# Altium PCB 7-Segment_PCB.PcbDoc
Units mm, origin at the board's own origin, x right, y up, seen from the top; angles counter-clockwise.
Board outline 30.25 x 44.05 mm, 2 copper layers (Top Layer, Bottom Layer), stack 1.571 mm thick; 33 components, 42 nets, 101 pads, 16 vias.
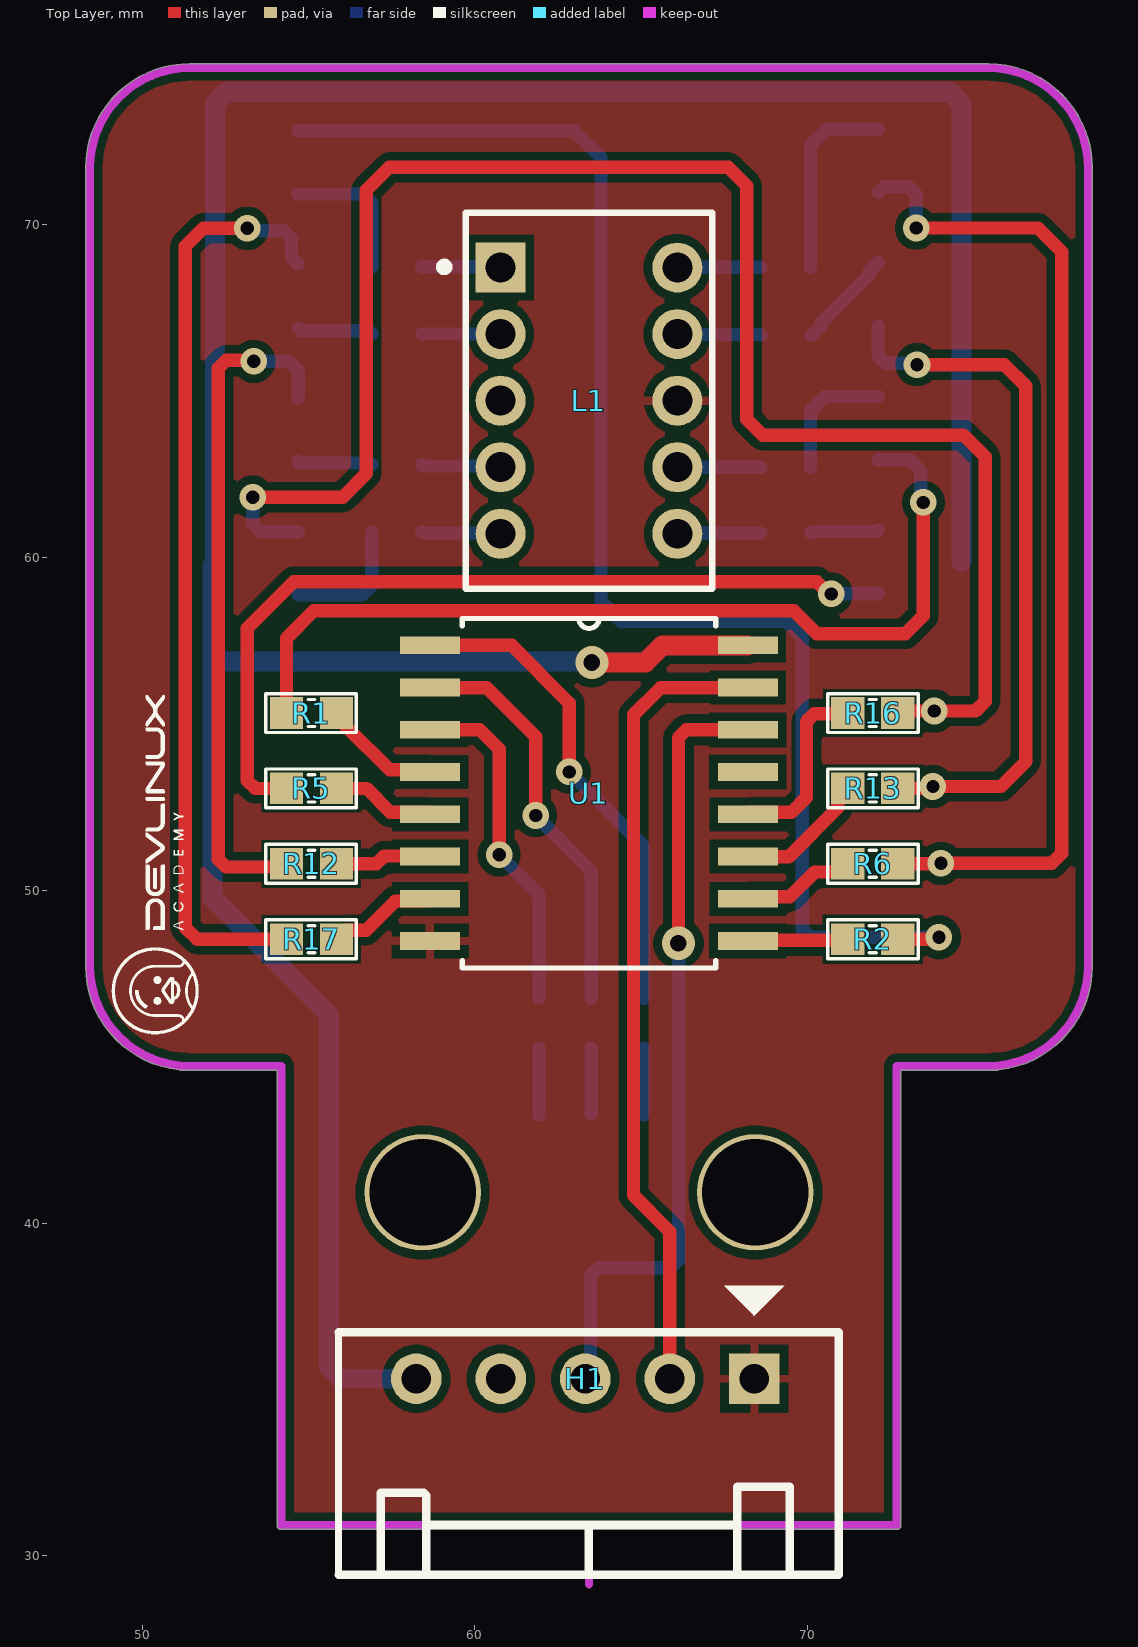
[diagram p0: Top Layer view]
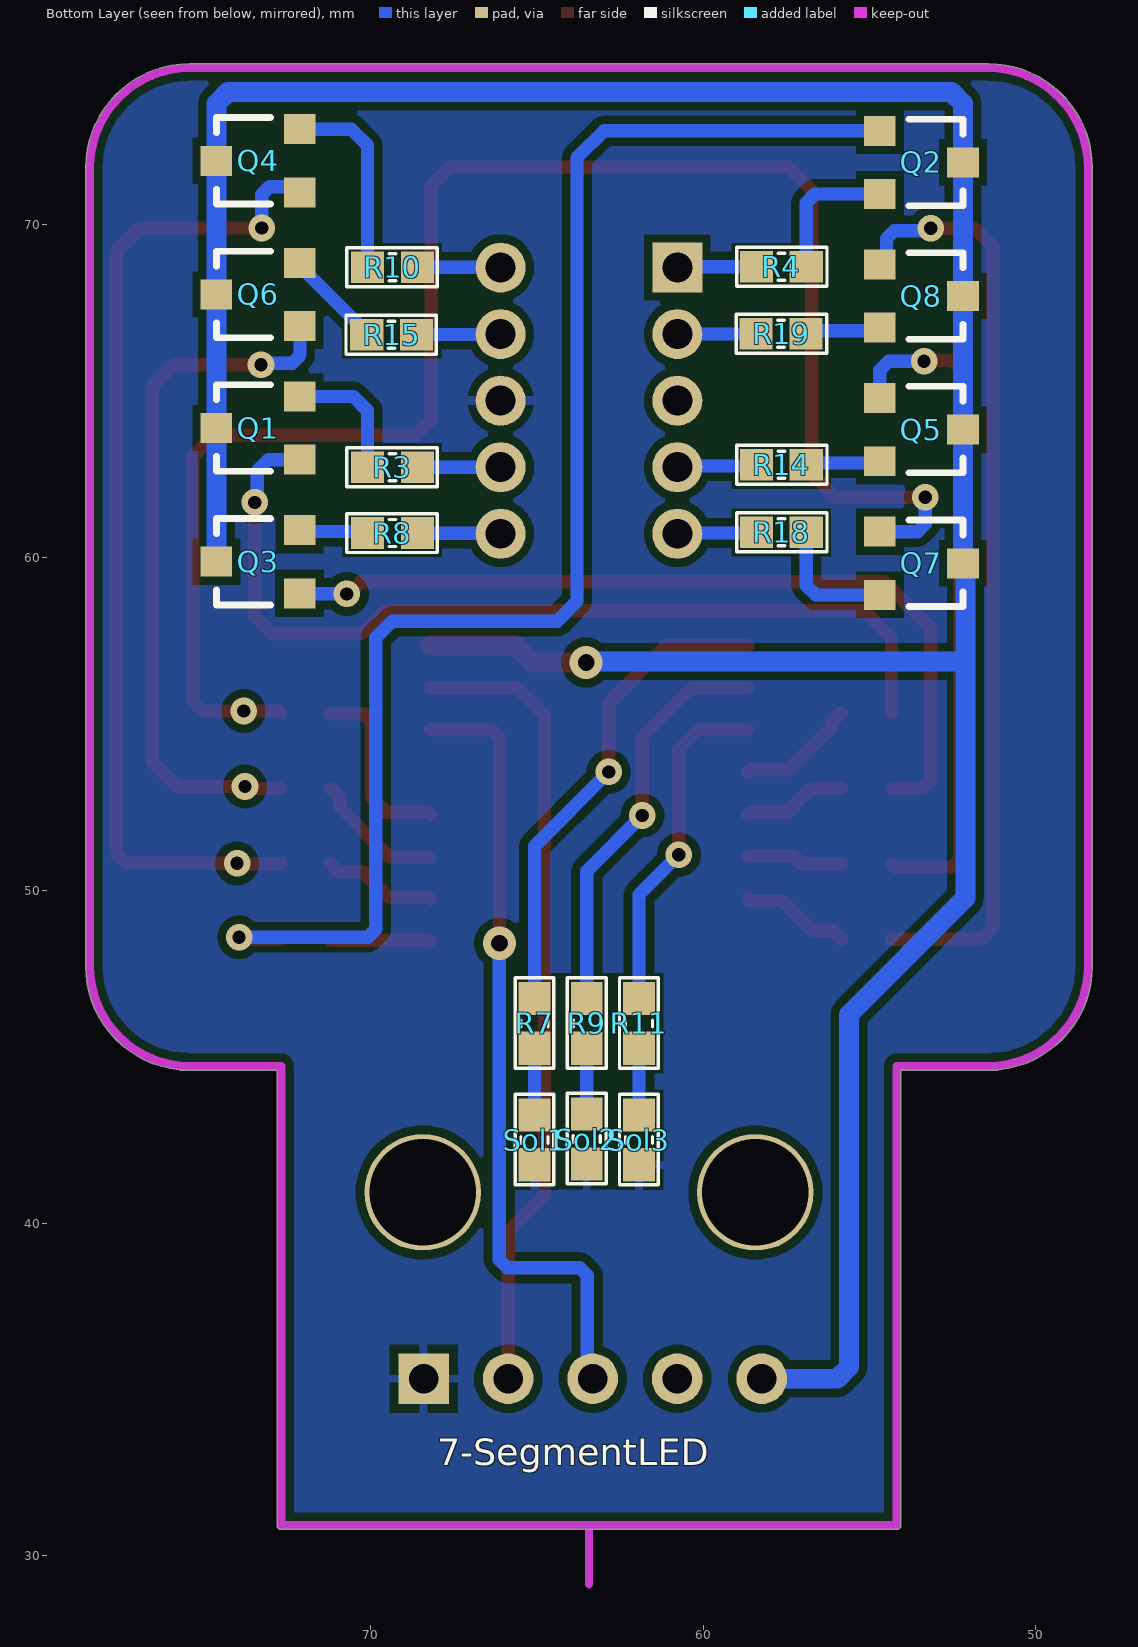
[diagram p1: Bottom Layer view, seen from below]
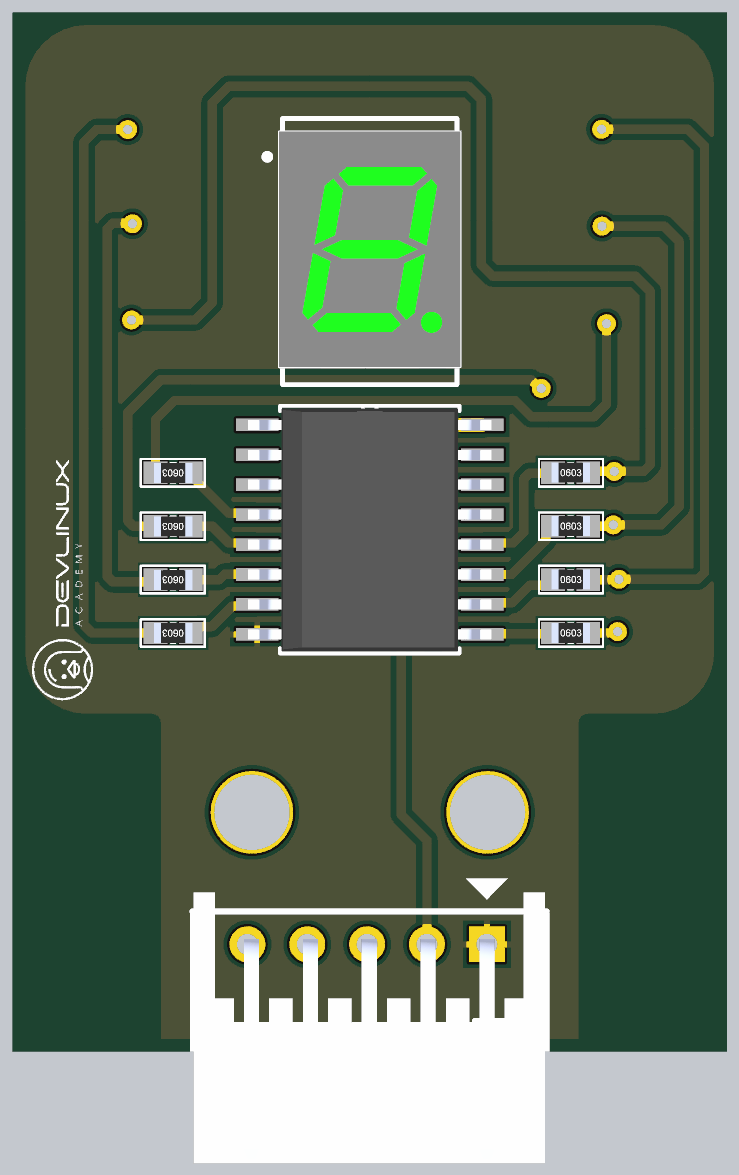
[diagram p2: 3D render of the assembled board from above, using the file's embedded part models]
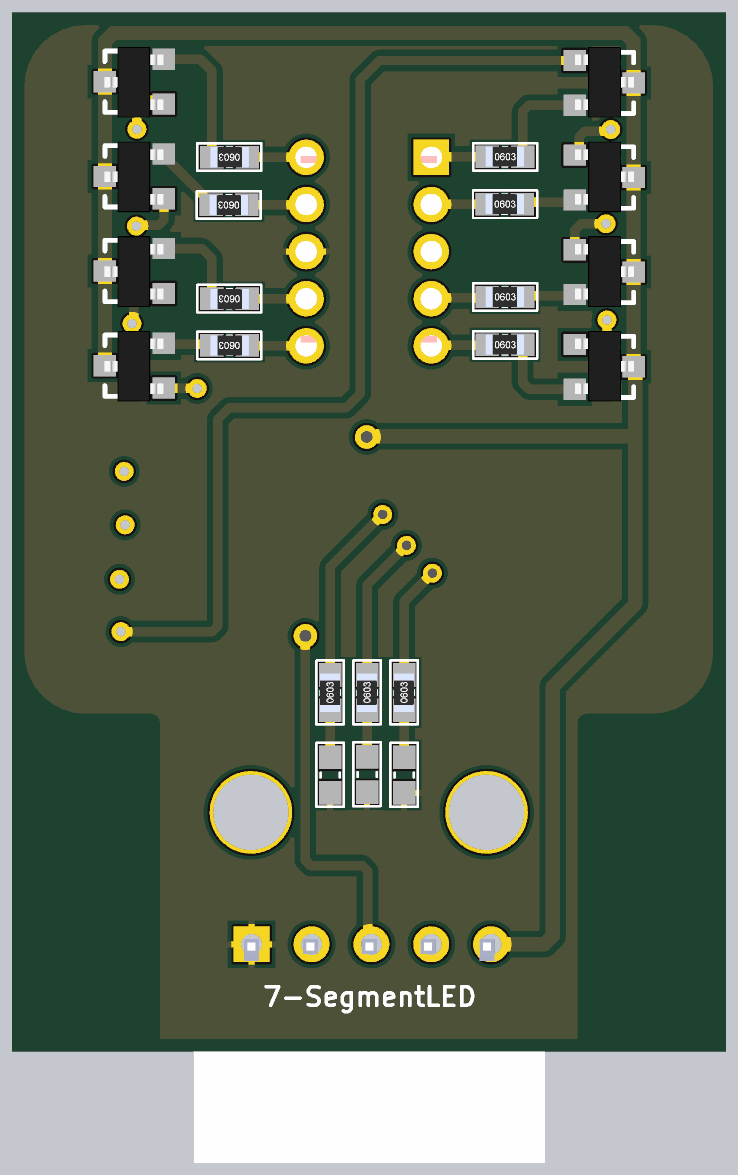
[diagram p3: 3D render of the assembled board from below, using the file's embedded part models]

## Layer stack, top to bottom
Top Solder: solder mask 0.0102, Solder Resist, Dk 3.5
Top Layer: signal copper 0.0356
Dielectric 1: dielectric 1.5, FR-4, Dk 4.8
Bottom Layer: signal copper 0.0356
Bottom Solder: solder mask 0.0102, Solder Resist, Dk 3.5

## Board outline
51.121,44.607 ccw(c51.182,44.719) 51.182,44.592 54.055,44.592 54.055,30.919 ccw(c54.182,30.919) 54.182,30.792 72.682,30.792 ccw(c72.682,30.919) 72.809,30.919 72.809,44.592 75.682,44.592 ccw(c75.682,44.719) 75.743,44.607 ccw(c75.432,47.719) 78.559,47.719 78.559,71.719 ccw(c75.432,71.719) 75.432,74.846 51.432,74.846 ccw(c51.432,71.719) 48.305,71.719 48.305,47.719 ccw(c51.432,47.719)

## Design rules (kind name [scope] priority, off if disabled: settings)
Clearance [All] p1: gap=0.254 ignorepadtopadclearanceinfootprint=FALSE except(0: Arc-Hole Track-Hole SMDPad-Hole THPad-Hole Via-Hole Fill-Hole Poly-Hole Region-Hole Text-Hole)
PolygonConnect [All] p1: connectstyle=Relief reliefconductorwidth=0.254 reliefentries=4 polygonreliefangle="90 Angle" airgapwidth=0.254
RoomDefinition 7-Segment_SCH [InComponentClass('7-Segment_SCH')] p1: confinementstyle=ConfineIn formatcopy=TRUE lockcomponents=FALSE outline 178.943,26.924 363.474,26.924 363.474,45.085 178.943,45.085
RoutingVias [All] p1: holewidth=0.4 width=0.8 viastyle="Through Hole" minholewidth=0 minwidth=0.6 maxholewidth=0.5 maxwidth=1
SolderMaskExpansion [All] p1: expansion=0.102 istentingtop=FALSE
Width [All] p1: maxlimit=0.6 minlimit=0.254 preferedwidth=0.4
30 further rules are at their usual default settings.

## Components (designator, comment, footprint, x,y, rotation, side; value= is the part's Value field where it differs from the comment)
H1 "Header 5P 2.54 Duc Cong" "Header 5P DC 2.54" 68.4,35.32 r270 top
L1 "LED 7 Thanh" "LED 7x1 0.28" 63.432,64.719 r0 top
Q1 "2N3906" SOT23 73.38,63.895 r90 bottom
Q2 "2N3906" SOT23 53.44,71.88 r270 bottom
Q3 "2N3906" SOT23 73.38,59.878 r90 bottom
Q4 "2N3906" SOT23 73.38,71.928 r90 bottom
Q5 "2N3906" SOT23 53.44,63.847 r270 bottom
Q6 "2N3906" SOT23 73.38,67.911 r90 bottom
Q7 "2N3906" SOT23 53.44,59.83 r270 bottom
Q8 "2N3906" SOT23 53.44,67.863 r270 bottom
R1 "10k" "tro smd 0603" 55.09,55.33 r180 top
R2 "10k" "tro smd 0603" 71.96,48.53 r0 top
R3 "220R" "tro smd 0603" 69.34,62.72 r0 bottom
R4 "220R" "tro smd 0603" 57.65,68.74 r180 bottom
R5 "10k" "tro smd 0603" 55.09,53.063 r180 top
R6 "10k" "tro smd 0603" 71.96,50.797 r0 top
R7 "1k" "tro smd 0603" 65.07,46 r90 bottom
R8 "220R" "tro smd 0603" 69.34,60.74 r0 bottom
R9 "1k" "tro smd 0603" 63.5,46 r90 bottom
R10 "220R" "tro smd 0603" 69.34,68.73 r0 bottom
R11 "1k" "tro smd 0603" 61.93,46 r90 bottom
R12 "10k" "tro smd 0603" 55.09,50.797 r180 top
R13 "10k" "tro smd 0603" 71.96,53.063 r0 top
R14 "220R" "tro smd 0603" 57.65,62.79 r180 bottom
R15 "220R" "tro smd 0603" 69.365,66.7 r0 bottom
R16 "10k" "tro smd 0603" 71.96,55.33 r0 top
R17 "10k" "tro smd 0603" 55.09,48.53 r180 top
R18 "220R" "tro smd 0603" 57.65,60.76 r180 bottom
R19 "220R" "tro smd 0603" 57.66,66.73 r180 bottom
Sol1 "0603" "Solder 0603" 65.07,42.5 r90 bottom
Sol2 "0603" "Solder 0603" 63.5,42.525 r90 bottom
Sol3 "0603" "Solder 0603" 61.93,42.5 r90 bottom
U1 "PCF8574AT" SOIC127P1032X265-16N 63.432,52.919 r0 top

## Footprints (in the part's own frame and the unit in brackets; to place one, negate y for a bottom-side part, rotate by r counter-clockwise, add the part's x,y. Pads: shape width x height; smd on the part's side, far side on the other; paste and mask are expansions set on the pad)
"Header 5P DC 2.54" [mil]
  rect 60x60 hole 35: 1(0,0)
  round 60 hole 35: 2(0,-100) 3(0,-200) 4(0,-300) 5(0,-400)
  silkscreen extent -110,-492 232,100, body extent -87,-490 366,97, height 240
"LED 7x1 0.28" [mm]
  rect 1.5x1.5 hole 0.9: 1(-2.655,4)
  round 1.5 hole 0.9: 2(-2.655,2) 3(-2.655,0) 4(-2.655,-2) 5(-2.655,-4) 6(2.655,-4) 7(2.655,-2) 8(2.655,0) 9(2.655,2) 10(2.655,4)
  silkscreen extent -4.47,-5.65 3.7,5.65, body extent -3.9,-4.95 3.9,5.15, height 8.04
SOIC127P1032X265-16N [mil]
  rect 71x21 smd: 1(-188,175) 2(-188,125) 3(-188,75) 4(-188,25) 5(-188,-25) 6(-188,-75) 7(-188,-125) 8(-188,-175) 9(188,-175) 10(188,-125) 11(188,-75) 12(188,-25) 13(188,25) 14(188,75) 15(188,125) 16(188,175)
  silkscreen extent -150,-207 150,207, body extent -203,-203 203,203, height 104
"Solder 0603" [mm] "Chip Capacitor, 2-Leads, Body 1,60x0,80mm, IPC Medium Density"
  rect 1x0.95 smd mask+0.076: 1(-0.75,0) 2(0.75,0)
  silkscreen extent -1.35,-0.58 1.37,0.58
SOT23 [mm] "SOT23"
  rect 0.9x0.95 smd: 1(-0.95,-1.25) 2(0,1.25)
  rect 0.9x0.95 smd mask+0: 3(0.95,-1.25)
  silkscreen extent -1.3,-0.38 1.3,1.25, body extent -1.52,-1.23 1.48,1.27, height 1.06
"tro smd 0603" [mm] "Chip Capacitor, 2-Leads, Body 1,60x0,80mm, IPC Medium Density"
  rect 1x0.95 smd mask+0.076: 1(-0.75,0) 2(0.75,0)
  silkscreen extent -1.35,-0.58 1.37,0.58, body extent -0.82,-0.42 0.82,0.43, height 0.44

## Part data
H1: "Cắm", Chung_Loai=Cắm, Don_Vi=Con, Ma_Hang=MH001308, Ten_Linh_Kien="Header 5P XH2.54-5P Đực Cong"
L1: library part "LED 7x1 0.28 Katot", "Dán", Chung_Loai=Dán, Don_Vi=Con, Ma_Hang=MH009707, Ten_Linh_Kien="Led 7 0.28 1 Số Katot Sáng Đỏ"
Q1 Q2 Q3 Q4 Q5 Q6 Q7 Q8: library part "Trans A1015 BA SMD", "PNP 600mW, ECB"
R1 R2 R5 R6 R12 R13 R16 R17: library part "Tro 0603 1% 10k", "Dán", Chung_Loai=Dán, Don_Vi=Con, Ma_Hang=MH006333, So_Chan=2, Ten_Linh_Kien="Trở 0603 1% 10k"
R3 R4 R8 R10 R14 R15 R18 R19: library part "Tro 0603 5% 220R", "Dán", Chung_Loai=Dán, Don_Vi=Con, Ma_Hang=MH006322, So_Chan=2, Ten_Linh_Kien="Trở 0603 5% 220R"
R7 R9 R11: library part "Tro 0603 1% 1k", "Dán", Chung_Loai=Dán, Don_Vi=Con, Ma_Hang=MH006334, So_Chan=2, Ten_Linh_Kien="Trở 0603 1% 1k"
Sol1 Sol2 Sol3: library part "Solder 0603", "Dán", Chung_Loai=Dán, Don_Vi=Con, So_Chan=2, Ten_Linh_Kien="Chân hàn 0603"
U1: "IÂ²C Bus IC Operating temperature: -40...+85 Â°C Power supply: 2.5...6 V Package: SO-16W", Package="SOIC-16 NXP Semiconductors", Check_prices=https://www.snapeda.com/parts/PCF8574AT/NXP+Semiconductors/view-part/?ref=eda, MF="NXP USA", MP=PCF8574AT, SnapEDA_Link=https://www.snapeda.com/parts/PCF8574AT/NXP+Semiconductors/view-part/?ref=snap

## Free pads (board coordinates)
  round 3.5 hole 3.2: 10(58.432,40.919) 10(68.432,40.919)

## Via types
v1: diameter 0.8, hole 0.4, Top Layer to Bottom Layer, 14 vias
v2: diameter 1, hole 0.5, Top Layer to Bottom Layer, 2 vias

## Nets (pads, with @x,y where several pads share a name; then routed paths per layer and width w, separated by ;. In a path a pad name is that pad's centre, name@x,y a point inside that pad or via, vN(x,y) a via of type N, cw(c..) or ccw(c..) an arc to the next point about the centre after c; other vN are vias at no path point)
+5: H1.5 Q1.2 Q2.2 Q3.2 Q4.2 Q5.2 Q6.2 Q7.2 Q8.2 U1.16 | length 95
  Top Layer w0.6: v2(63.52,56.85) 65.126,56.85 65.64,57.364 U1.16
  Bottom Layer w0.6: H1.5 55.971,35.32 55.62,35.671 55.62,46.27 52.12,49.77 52.12,56.88 ; v2(63.52,56.85) 63.49,56.88 52.12,56.88 ; Q3.2 Q1.2 Q6.2 Q4.2 74.63,73.649 74.279,74 52.541,74 52.19,73.649 Q2.2 Q8.2 Q5.2 Q7.2 52.12,59.76 52.12,56.88
A: L1.7 R3.1 | length 2.5
  Bottom Layer w0.4: L1.7 R3.1
B: L1.6 R8.1 | length 2.5
  Bottom Layer w0.4: L1.6 66.098,60.73 68.579,60.73 R8.1
C: L1.4 R14.1 | length 2.4
  Bottom Layer w0.4: R14.1 58.436,62.754 60.742,62.754 L1.4
D: L1.2 R19.1 | length 2.4
  Bottom Layer w0.4: R19.1 58.416,66.724 60.772,66.724 L1.2
E: L1.1 R4.1 | length 2.4
  Top Layer w0.4: L1.1@60.756,68.74 L1.1
  Bottom Layer w0.4: R4.1 60.756,68.74 L1.1
F: L1.10 R10.1 | length 2.5
  Bottom Layer w0.4: L1.10 66.093,68.724 68.584,68.724 R10.1
G: L1.9 R15.1 | length 2.5
  Bottom Layer w0.4: L1.9 66.097,66.71 68.606,66.71 R15.1
GND: H1.1 L1.8 Sol1.1 Sol2.1 Sol3.1 U1.8
H: L1.5 R18.1 | length 2.4
  Top Layer w0.4: L1.5@60.757,60.74 L1.5
  Bottom Layer w0.4: R18.1 58.421,60.74 60.757,60.74 L1.5
NetQ1_1: Q1.1 R1.2 | length 28
  Top Layer w0.4: R1.2 54.34,57.58 55.16,58.4 69.592,58.4 70.282,57.71 72.94,57.71 73.48,58.25 v1(73.48,61.66)
  Bottom Layer w0.4: Q1.1 73.065,62.945 73.403,62.607 73.403,61.737 v1(73.48,61.66)
NetQ1_3: Q1.3 R3.2 | length 3.9
  Bottom Layer w0.4: R3.2 70.09,64.42 70.515,64.845 Q1.3
NetQ2_1: Q2.1 R2.2 | length 43.5
  Top Layer w0.4: R2.2 73.89,48.53 v1(73.95,48.59)
  Bottom Layer w0.4: Q2.1 62.98,72.83 63.794,72.016 63.794,58.686 64.39,58.09 69.34,58.09 69.84,57.59 69.84,48.824 70.074,48.59 v1(73.95,48.59)
NetQ2_3: Q2.3 R4.2 | length 4.2
  Bottom Layer w0.4: Q2.3 56.64,70.93 56.9,70.67 R4.2
NetQ3_1: Q3.1 R5.2 | length 25.6
  Top Layer w0.4: R5.2 53.394,53.063 53.16,53.298 53.16,57.88 54.56,59.28 70.276,59.28 70.646,58.91 v1(70.71,58.91)
  Bottom Layer w0.4: v1(70.71,58.91) 70.719,58.919 72.121,58.919 Q3.1
NetQ3_3: Q3.3 R8.2 | length 2.1
  Bottom Layer w0.4: R8.2 70.134,60.784 72.086,60.784 Q3.3
NetQ4_1: Q4.1 R6.2 | length 30.1
  Top Layer w0.4: R6.2 73.997,50.797 v1(74.01,50.81) 77.34,50.81 77.64,51.11 77.64,69.19 76.92,69.91 v1(73.27,69.91)
  Bottom Layer w0.4: Q4.1 72.302,71.15 73.036,71.15 73.27,70.916 v1(73.27,69.91)
NetQ4_3: Q4.3 R10.2 | length 5.9
  Bottom Layer w0.4: R10.2 70.09,72.39 70.578,72.878 Q4.3
NetQ5_1: Q5.1 R12.2 | length 20.4
  Top Layer w0.4: v1(53.36,65.9) 53.33,65.93 52.524,65.93 52.29,65.696 52.29,50.934 52.524,50.7 54.243,50.7 R12.2
  Bottom Layer w0.4: v1(53.36,65.9) 54.42,65.9 54.69,65.63 Q5.1
NetQ5_3: Q5.3 R14.2 | length 2.3
  Bottom Layer w0.4: Q5.3 54.743,62.843 56.847,62.843 R14.2
NetQ6_1: Q6.1 R13.2 | length 21.2
  Top Layer w0.4: R13.2 73.713,53.063 v1(73.77,53.12) 75.81,53.12 76.56,53.87 76.56,65.16 75.92,65.8 v1(73.29,65.8)
  Bottom Layer w0.4: Q6.1 72.12,66.951 72.12,66.074 72.354,65.84 73.25,65.84 v1(73.29,65.8)
NetQ6_3: Q6.3 R15.2 | length 3
  Bottom Layer w0.4: R15.2 70.14,66.7 70.415,66.975 70.415,67.065 71.855,68.505 71.855,68.611 72.105,68.861 Q6.3
NetQ7_1: Q7.1 R16.2 | length 51.2
  Top Layer w0.4: v1(53.321,61.816) 56.026,61.816 56.74,62.53 56.74,71.04 57.43,71.73 67.62,71.73 68.17,71.18 68.17,64.16 68.65,63.68 74.69,63.68 75.34,63.03 75.34,55.68 75.05,55.39 v1(73.81,55.39) 72.77,55.39 R16.2
  Bottom Layer w0.4: v1(53.321,61.816) 53.321,61.014 53.555,60.78 Q7.1
NetQ7_3: Q7.3 R18.2 | length 3.9
  Bottom Layer w0.4: Q7.3 56.62,58.88 56.9,59.16 R18.2
NetQ8_1: Q8.1 R17.2 | length 28.1
  Top Layer w0.4: v1(53.16,69.9) 51.84,69.9 51.3,69.36 51.3,48.881 51.651,48.53 R17.2
  Bottom Layer w0.4: v1(53.16,69.9) 53.237,69.823 54.258,69.823 54.492,69.589 54.492,69.011 Q8.1
NetQ8_3: Q8.3 R19.2 | length 2.3
  Bottom Layer w0.4: Q8.3 54.782,66.822 56.818,66.822 R19.2
NetR7_1: R7.1 Sol1.2 | length 2
  Bottom Layer w0.4: Sol1.2 R7.1
NetR7_2: R7.2 U1.1 | length 14.7
  Top Layer w0.4: U1.1 61.106,57.364 62.84,55.63 v1(62.84,53.56)
  Bottom Layer w0.4: v1(62.84,53.56) 65.07,51.33 R7.2
NetR9_1: R9.1 Sol2.2 | length 2
  Bottom Layer w0.4: Sol2.2 R9.1
NetR9_2: R9.2 U1.2 | length 12.3
  Top Layer w0.4: U1.2 60.356,56.094 61.83,54.62 v1(61.83,52.25)
  Bottom Layer w0.4: v1(61.83,52.25) 63.5,50.58 R9.2
NetR11_1: R11.1 Sol3.2 | length 2
  Bottom Layer w0.4: Sol3.2 R11.1
NetR11_2: R11.2 U1.3 | length 10.3
  Top Layer w0.4: U1.3 60.146,54.824 60.73,54.24 v1(60.73,51.07)
  Bottom Layer w0.4: v1(60.73,51.07) 61.93,49.87 R11.2
P0: R1.1 U1.4 | length 3.6
  Top Layer w0.4: R1.1 55.865,55.33 56.14,55.055 56.14,54.92 57.439,53.621 58.59,53.621 U1.4
P1: R5.1 U1.5 | length 3.1
  Top Layer w0.4: R5.1 56.747,53.063 57.459,52.351 58.59,52.351 U1.5
P2: R12.1 U1.6 | length 2.9
  Top Layer w0.4: R12.1 57.037,50.797 57.27,51.03 58.641,51.03 U1.6
P3: R17.1 U1.7 | length 3.3
  Top Layer w0.4: R17.1 56.115,48.805 56.735,48.805 57.607,49.677 58.59,49.677 U1.7
P4: R2.1 U1.9 | length 3
  Top Layer w0.4: U1.9 68.235,48.502 71.182,48.502 R2.1
P5: R6.1 U1.10 | length 3.4
  Top Layer w0.4: U1.10 68.274,49.811 69.471,49.811 70.21,50.55 70.963,50.55 R6.1
P6: R13.1 U1.11 | length 4
  Top Layer w0.4: U1.11 69.444,51.014 70.91,52.48 70.91,52.788 71.185,53.063 R13.1
P7: R16.1 U1.12 | length 5.6
  Top Layer w0.4: U1.12 68.274,52.351 69.521,52.351 69.97,52.8 69.97,55.076 70.204,55.31 71.19,55.31 R16.1
SCL: H1.3 U1.14 | length 23.9
  Top Layer w0.4: v2(66.12,48.41) 66.12,54.59 66.354,54.824 U1.14
  Bottom Layer w0.4: H1.3 63.48,35.48 63.48,38.426 63.714,38.66 65.896,38.66 66.13,38.894 66.13,48.4 v2(66.12,48.41)
SDA: H1.2 U1.15 | length 24.2
  Top Layer w0.4: H1.2 65.86,39.74 64.77,40.83 64.77,55.28 65.584,56.094 U1.15
pads on no net: H1.4 L1.3 U1.13

## Polygon pours and split planes (outlines as drawn)
GND on Top Layer "GND_L01_P000" (solid, remove dead copper, pour order 0): 43.26,79.66 83.57,79.66 84.61,78.62 84.16,78.17 84.16,20.31 40.28,20.31 39.24,21.35
GND on Bottom Layer "GND_L02_P001" (solid, remove dead copper, pour order 1): 43.11,78.77 44.75,77.13 82.82,77.13 82.82,23.43 81.78,22.39 45.49,22.39

## Keep-outs
Keep-Out Layer:
  lines w0.254: 51.182,44.719 54.182,44.719 54.182,30.919 72.682,30.919 72.682,44.719 75.682,44.719 ; 51.432,44.719 cw(c51.432,47.719) 48.432,47.719 48.432,71.719 cw(c51.432,71.719) 51.432,74.719 75.432,74.719 cw(c75.432,71.719) 78.432,71.719 78.432,47.719 cw(c75.432,47.719) 75.432,44.719 ; 63.432,29.142 63.432,30.919

## Silkscreen, mask and mechanical layers (free items; w line width, h text height)
Top Overlay:
  drawing of 21 lines, arcs and shapes, not listed
Bottom Overlay:
  text "7-SegmentLED" at 68,32.717 h0.8